# Altium PCB PCB ESP.PcbDoc
Units mm, origin at the board's own origin, x right, y up, seen from the top; angles counter-clockwise.
Board outline 62.23 x 67.94 mm, 2 copper layers (Top Layer, Bottom Layer); 31 components, 24 nets, 145 pads, 31 vias.
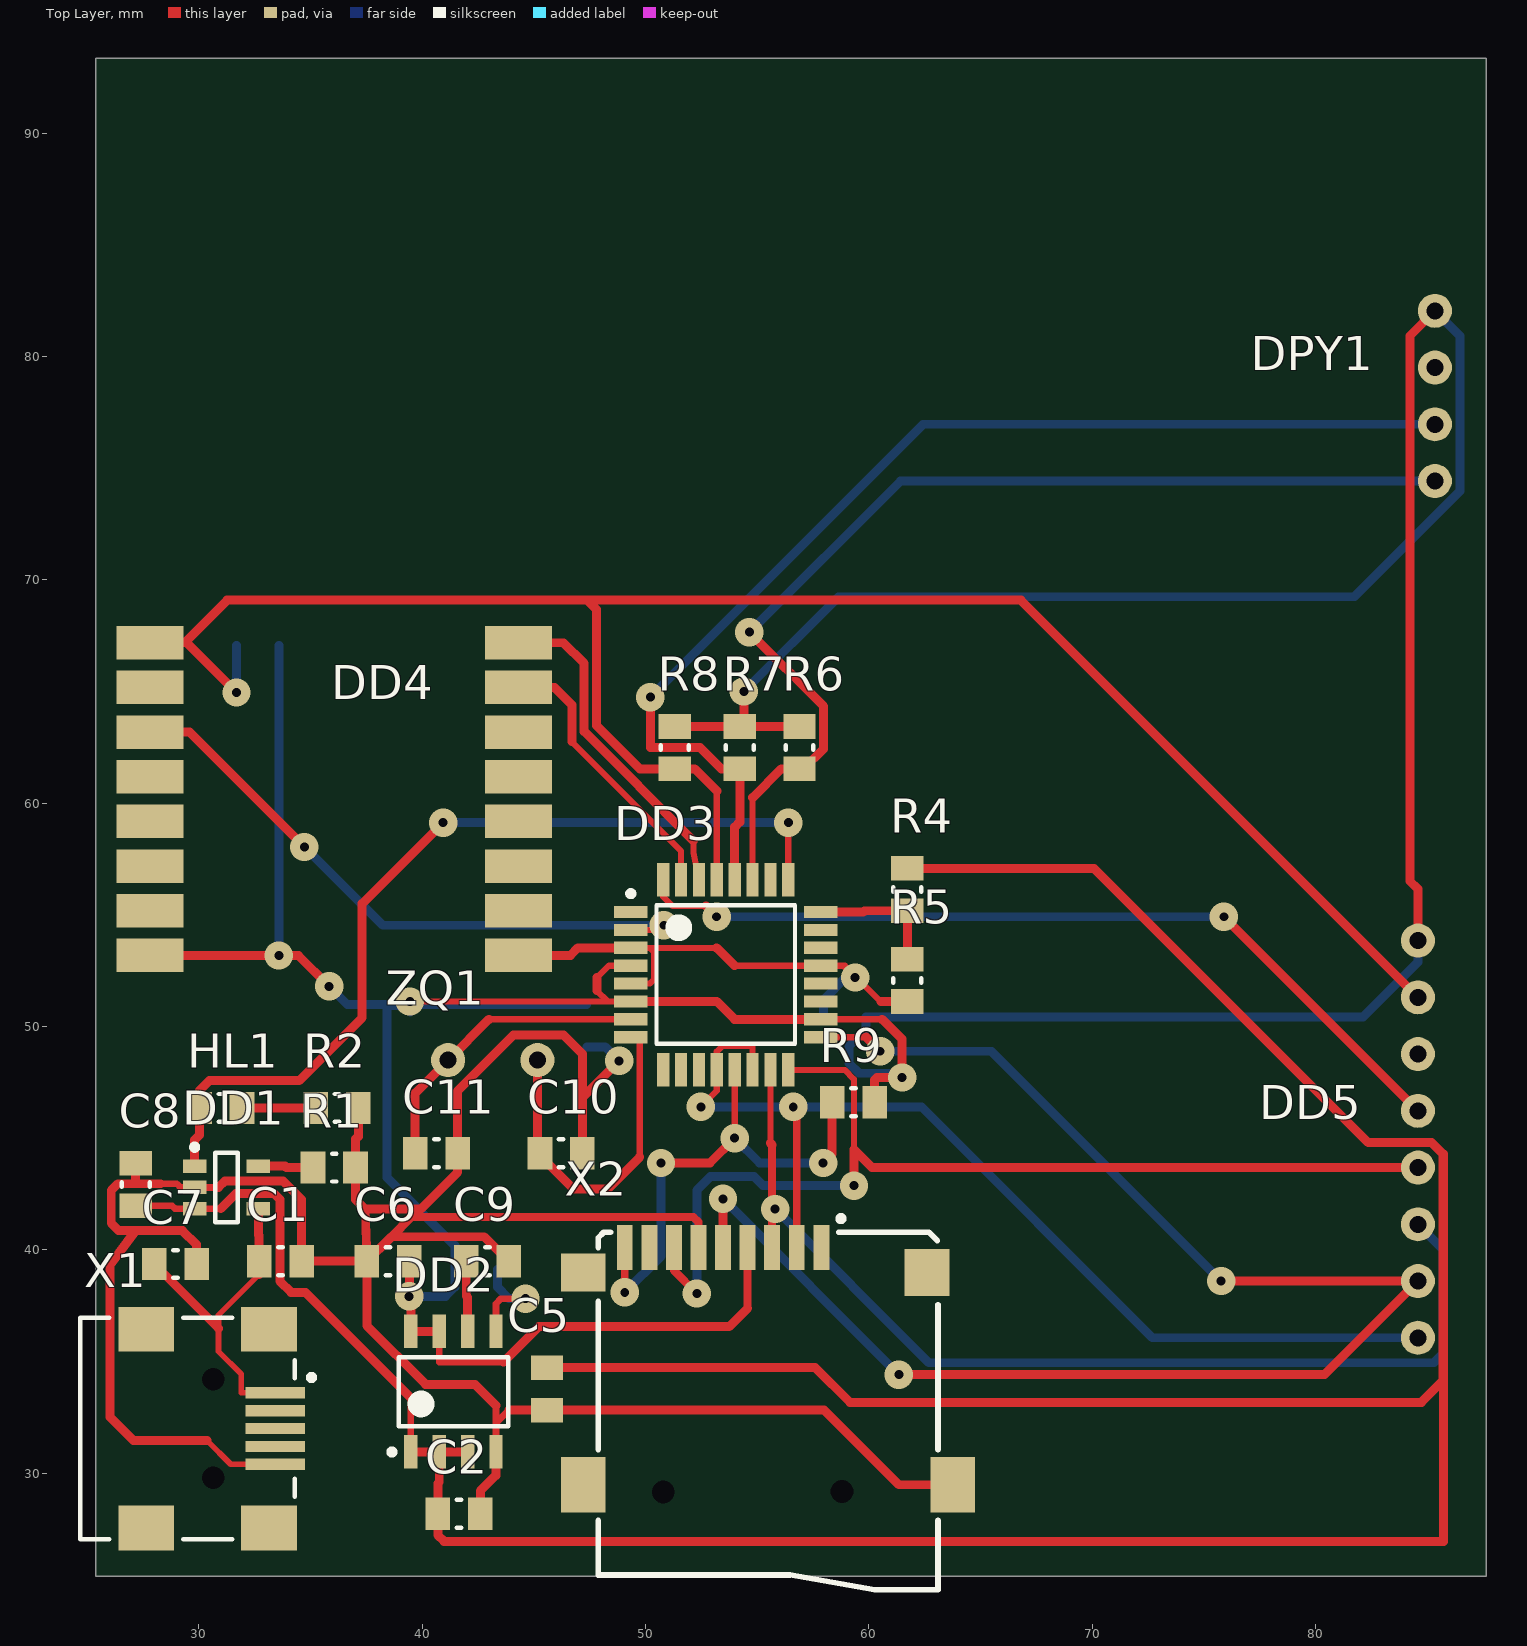
[diagram p0: Top Layer view]
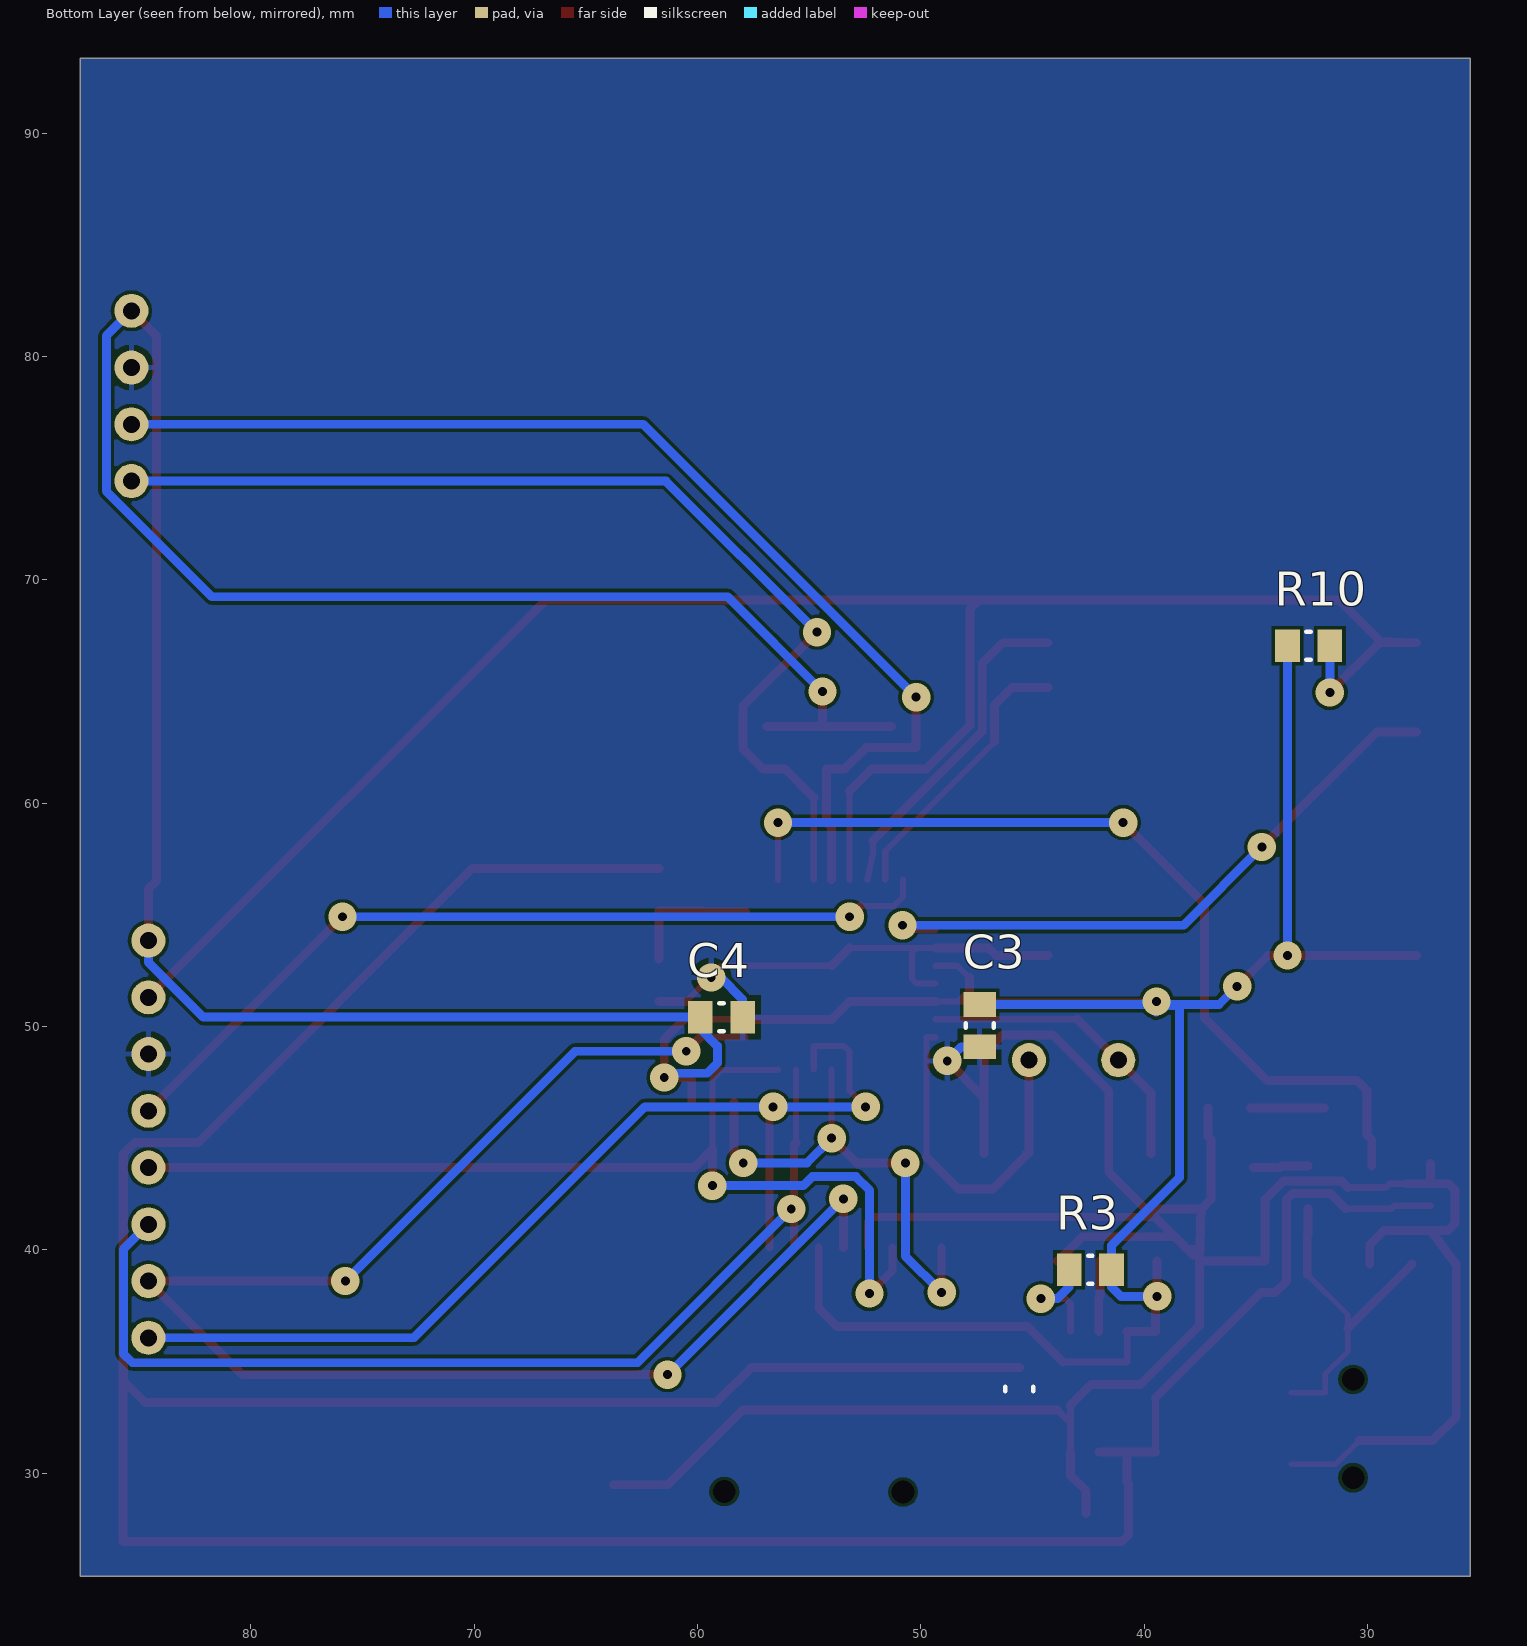
[diagram p1: Bottom Layer view, seen from below]

## Layer stack, top to bottom
Top Solder: solder mask 0.0102, Solder Resist, Dk 3.5
Top Layer: signal copper 0.0356
Dielectric 1: dielectric 0.32, FR-4, Dk 4.8
Bottom Layer: signal copper 0.0356
Bottom Solder: solder mask 0.0102, Solder Resist, Dk 3.5

## Board outline
25.4,25.4 87.63,25.4 87.63,93.345 25.4,93.345

## Design rules (kind name [scope] priority, off if disabled: settings)
Clearance [All] p1: gap=0.15
ComponentClearance [All] p1 off: gap=0.254 collisioncheckmode=3 verticalgap=0.254 showdistances=FALSE
Height [All] p1 off: minheight=0 maxheight=25.4 prefheight=12.7
PolygonConnect [All] p1: connectstyle=Relief reliefconductorwidth=0.254 reliefentries=4 polygonreliefangle="90 Angle" airgapwidth=0.254
RoutingVias [All] p1: holewidth=0.4 width=1.27 viastyle="Through Hole" minholewidth=0.4 minwidth=0.8 maxholewidth=0.711 maxwidth=1.27
SMDNeckDown [All] p1: percent=50.000
SolderMaskExpansion [All] p1: expansion=0.102
Width [All] p1: maxlimit=1 minlimit=0.2 preferedwidth=0.4 minimp=50.000000 maximp=50.000000 favimp=50.000000
28 further rules are at their usual default settings.

## Components (designator, comment, footprint, x,y, rotation, side; value= is the part's Value field where it differs from the comment)
C1 "C0805" CAPC2113X06N#1 33.655,39.497 r180 top
C2 "C0805" CAPC2113X06N#1 41.656,28.194 r180 top
C3 "C0805" CAPC2113X06N#1 47.371,50.038 r270 bottom
C4 "C0805" CAPC2113X06N#1 58.928,50.419 r180 bottom
C5 "C0805" CAPC2113X06N#2 45.593,33.782 r90 top
C6 "C0805" CAPC2113X06N#1 38.481,39.497 r0 top
C7 "C0805" CAPC2113X06N#1 28.956,39.37 r0 top
C8 "C0805" CAPC2113X06N#1 27.178,42.926 r270 top
C9 "C0805" CAPC2113X06N#1 42.926,39.497 r180 top
C10 "C0805" CAPC2113X06N#1 46.228,44.323 r180 top
C11 "C0805" CAPC2113X06N#1 40.64,44.323 r180 top
DD1 "MCP73831T" SOT95P270X145-5N 31.242,42.799 r0 top
DD2 "MCP1725-3302E/MC" SOIC127P600X175-8N 41.402,33.655 r90 top
DD3 "ATMega328" TQFP80P900X900X120-32N 53.594,52.324 r0 top
DD4 "ESP-07" ESP-07 27.813,51.181 r0 top
DD5 "RC522" RFID-RC522 87.122,25.908 r90 top
DPY1 "SSD1306" SSD 59.944,92.202 r270 top
HL1 "LED0805" CAPC2113X06N#1 30.988,46.355 r0 top
R1 "R0805" CAPC2113X06N#1 36.068,43.688 r0 top
R2 "R0805" CAPC2113X06N#1 36.195,46.355 r0 top
R3 "R0805" CAPC2113X06N#1 42.418,39.116 r0 bottom
R4 "R0805" CAPC2113X06N#1 61.722,56.134 r270 top
R5 "R0805" CAPC2113X06N#1 61.722,52.07 r270 top
R6 "R0805" CAPC2113X06N#1 56.896,62.484 r90 top
R7 "R0805" CAPC2113X06N#1 54.229,62.484 r90 top
R8 "R0805" CAPC2113X06N#1 51.308,62.484 r90 top
R9 "R0805" CAPC2113X06N#1 59.309,46.609 r0 top
R10 "R0805" CAPC2113X06N#1 32.639,67.056 r180 bottom
X1 "USB_micro" "MiniUSB Socket" 25.4,32.004 r180 top
X2 "uSD" "MICROSD Slot" 51.435,40.259 r90 top
ZQ1 "ZQ_01" HC49 42.164,47.498 r180 top

## Footprints (in the part's own frame and the unit in brackets; to place one, negate y for a bottom-side part, rotate by r counter-clockwise, add the part's x,y. Pads: shape width x height; smd on the part's side, far side on the other; paste and mask are expansions set on the pad)
CAPC2113X06N#1 [mm] "Chip Capacitor, 2-Leads, Body 2,10x1,30mm, IPC Medium Density"
  rect 1.1x1.45 smd: 1(-0.95,0) 2(0.95,0)
  silkscreen extent -0.1,-0.62 0.1,0.62, body extent -1.1,-0.7 1.1,0.7, height 0.6
CAPC2113X06N#2 [mm] "Chip Capacitor, 2-Leads, Body 2,10x1,30mm, IPC Medium Density"
  rect 1.1x1.45 smd: 1(0.95,0) 2(-0.95,0)
  body extent -1.1,-0.7 1.1,0.7, height 0.6
ESP-07 [mm] "ESP8266 ESP-07 Module"
  rect 3x1.5 smd: 1(0,16) 2(0,14) 3(0,12) 4(0,10) 5(0,8) 6(0,6) 7(0,4) 8(0,2) 9(16.5,16) 10(16.5,14) 11(16.5,12) 12(16.5,10) 13(16.5,8) 14(16.5,6) 15(16.5,4) 16(16.5,2)
HC49 [mil]
  round 60 hole 30: 1(-118.11,-39.37) 2(39.37,-39.37)
"MICROSD Slot" [mil] "MicroSD Card Socket"
  rect 80x28 smd: 1(-6,-253.47) 2(-6,-210.16) 3(-6,-166.85) 4(-6,-123.55) 5(-6,-80.24) 6(-6,-36.93) 7(-6,6.38) 8(-6,49.68) 9(-6,92.99)
  rect 98.43x78.74 smd: 10(-424.01,-485) 13(-424.01,166)
  rect 83x78.74 smd: 11(-50,-439.8)
  rect 67x78.74 smd: 12(-50,166)
  round 23.62 hole 40 unplated: MH1(-436.89,25) MH2(-436,-289.96)
  silkscreen extent -609,-459 50,140, body extent -611,-460 21,140, height 67
"MiniUSB Socket" [mm] "Connector; USB2.0, Type B, SM; 5 Position; Right Angle"
  rect 2.667x0.5 smd: 1(-8.026,-1.6) 2(-8.026,-0.8) 3(-8.026,0) 4(-8.026,0.8) 5(-8.026,1.6)
  rect 2.5x2 smd: 6(-7.75,4.45) 7(-2.25,4.45) 8(-7.75,-4.45) 9(-2.25,-4.45)
  round 0.6 hole 1.016 unplated: MH1(-5.25,2.2) MH2(-5.25,-2.2)
  silkscreen extent -9.78,-4.95 0.7,4.95, body extent -8.9,-4.95 0.7,4.95, height 3.9
RFID-RC522 [mil] "NXP RFID Reader Module"
  round 60 hole 30: 1(400,100) 2(500,100) 3(600,100) 4(700,100) 5(800,100) 6(900,100) 7(1000,100) 8(1100,100)
SOIC127P600X175-8N [mm] "SOIC, 8-Leads, Body 4,90x3,90mm, Pitch 1,27mm, IPC Medium Density"
  rect 1.5x0.6 smd: 1(-2.7,1.905) 2(-2.7,0.635) 3(-2.7,-0.635) 4(-2.7,-1.905) 5(2.7,-1.905) 6(2.7,-0.635) 7(2.7,0.635) 8(2.7,1.905)
  silkscreen extent -2.82,-2.45 1.55,2.88, body extent -1.95,-2.45 1.95,2.45, height 1.75
SOT95P270X145-5N [mm] "SOT23, 5-Leads, Body 2,90x2,70mm, Pitch 0,95mm, IPC Medium Density"
  rect 1.05x0.6 smd: 1(-1.425,0.95) 2(-1.425,0) 3(-1.425,-0.95) 4(1.425,-0.95) 5(1.425,0.95)
  silkscreen extent -1.55,-1.55 0.5,1.92, body extent -0.9,-1.55 0.9,1.55, height 1.45
SSD [mil]
  round 60 hole 30: 1(400,1000) 2(500,1000) 3(600,1000) 4(700,1000)
TQFP80P900X900X120-32N [mm] "TQFP, 32-Leads, Body 7,00x7,00mm, Pitch 0,80mm, IPC Medium Density"
  rect 1.5x0.55 smd: 1(-4.25,2.8) 2(-4.25,2) 3(-4.25,1.2) 4(-4.25,0.4) 5(-4.25,-0.4) 6(-4.25,-1.2) 7(-4.25,-2) 8(-4.25,-2.8) 17(4.25,-2.8) 18(4.25,-2) 19(4.25,-1.2) 20(4.25,-0.4) 21(4.25,0.4) 22(4.25,1.2) 23(4.25,2) 24(4.25,2.8)
  rect 0.55x1.5 smd: 9(-2.8,-4.25) 10(-2,-4.25) 11(-1.2,-4.25) 12(-0.4,-4.25) 13(0.4,-4.25) 14(1.2,-4.25) 15(2,-4.25) 16(2.8,-4.25) 25(2.8,4.25) 26(2,4.25) 27(1.2,4.25) 28(0.4,4.25) 29(-0.4,4.25) 30(-1.2,4.25) 31(-2,4.25) 32(-2.8,4.25)
  silkscreen extent -4.37,-3.1 3.1,3.75, body extent -3.5,-3.5 3.5,3.5, height 1.2

## Part data
C1 C2 C3 C4 C5 C6 C7 C8 C9 C10 C11: "Chip capasitor"
DD1: "MCP73831T Li-ion/Li-po charger"
DD2: "MCP1725-3302E/MC ULDO"
DD3: "Atmel ATMega328 MCU"
DD4: "ESP8266 Wi-Fi module"
DD5: "RC522 RFID module"
DPY1: "SSD1306 OLED Screen"
HL1: library part HL_02, "Светодиод"
R1 R2 R3 R4 R5 R6 R7 R8 R9 R10: "Резистор"
X1: library part USB, "USB micro"
X2: library part "uSD slot", "uSD slot"
ZQ1: "Элемент пьезоэлектрический с двумя выводами"

## Via types
v1: diameter 1.27, hole 0.4, Top Layer to Bottom Layer, 31 vias

## Nets (pads, with @x,y where several pads share a name; then routed paths per layer and width w, separated by ;. In a path a pad name is that pad's centre, name@x,y a point inside that pad or via, vN(x,y) a via of type N, cw(c..) or ccw(c..) an arc to the next point about the centre after c; other vN are vias at no path point)
3.3V: C3.1 C4.1 C6.2 DD2.7 DD2.8 DD3.4 DD3.6 DD3.18 DD4.8 DD5.8 DPY1.1 R3.1 R6.2 R7.2 R8.2 R9.2 R10.1 X2.4 | length 216.8
  Top Layer w0.275: v1(39.451,51.124) 48.317,51.124 ; 47.828,51.613 48.317,51.124 ; 47.828,52.191 48.362,52.724 DD3.4 ; DD3.6 48.317,51.124 ; DD3.18 60.598,50.324
  Top Layer w0.3: DD2.7 40.767,34.987 43.648,34.987
  Top Layer w0.356: 54.573,37.389 X2.4
  Top Layer w0.4: DD4.8 v1(33.589,53.181) 34.461,53.181 v1(35.841,51.801) ; v1(39.421,37.922) 39.431,37.932 v1@39.431,37.937 ; C6.2 v1@39.431,37.937 ; DD2.7 DD2.8 39.497,37.871 v1@39.431,37.937 ; 43.648,34.987 45.226,36.565 53.749,36.565 54.573,37.389 ; 47.828,51.613 47.828,52.191 ; DD3.6 53.188,51.124 53.988,50.324 DD3.18 ; R8.2 R7.2 R7.2@54.407,63.434 ; v1(54.407,64.999) R7.2@54.407,63.434 ; R6.2 R7.2@54.407,63.434 ; R9.2 60.259,47.615 60.362,47.718 v1(61.488,47.718) 61.488,49.434 60.598,50.324 ; DD5.8 84.582,56.159 84.226,56.515 84.226,80.924 DPY1.1
  Bottom Layer w0.4: v1(33.589,53.181) R10.1 ; v1(35.841,51.801) 36.654,50.988 v1@39.587,50.988 ; v1(39.421,37.922) 41.046,37.922 41.468,38.344 R3.1 41.468,40.193 38.43,43.231 38.43,50.946 39.23,50.911 v1@39.471,50.648 ; v1(39.451,51.124) v1@39.587,50.988 ; C3.1 v1@39.587,50.988 ; v1(54.407,64.999) 58.649,69.24 81.737,69.24 86.462,73.965 86.462,80.924 DPY1.1 ; v1(61.488,47.718) 61.296,47.91 59.563,47.91 59.111,48.362 59.111,49.127 59.878,49.894 C4.1 82.118,50.419 84.582,52.883 DD5.8
GND: C1.1 C2.1 C3.2 C4.2 C5.2 C6.1 C7.2 C8.1 C9.1 C10.1 C11.1 DD1.2 DD2.4 DD3.3 DD3.5 DD3.21 DD4.16 DD5.6 DPY1.2 R1.2 R2.2 R5.2 X1.5 X2.6 X2.10 | length 156.3
  Top Layer w0.25: 30.366,31.471 31.433,30.404 X1.5
  Top Layer w0.275: DD3.5 50.19,51.924 50.394,52.127 50.394,53.321 50.19,53.524 ; DD3.3 50.19,53.524 ; 53.188,53.524 50.19,53.524 ; 53.988,52.724 DD3.21 58.858,52.724 ; v1(59.385,52.197) 58.858,52.724 ; 60.532,51.12 58.928,52.724 58.858,52.724
  Top Layer w0.3: 28.284,42.963 29.021,42.963 29.185,42.799 DD1.2 30.886,42.799 ; DD2.4 43.307,32.248 ; 43.307,33.045 43.307,32.248 ; 43.891,32.832 43.307,32.248
  Top Layer w0.356: 39.522,41.478 52.144,41.478 52.373,41.25 X2.6
  Top Layer w0.4: 27.178,43.18 C8.1 ; 28.284,42.963 26.376,42.963 26.086,42.672 26.086,41.199 26.416,40.869 27.178,40.869 ; C7.2 29.906,40.234 29.271,40.869 27.178,40.869 ; 30.366,31.471 27.076,31.471 26.035,32.512 26.035,39.345 27.178,40.869 ; 30.886,42.799 31.166,43.078 33.782,43.078 34.605,42.255 C1.1 C6.1 ; R2.2 37.145,45.085 37.018,44.958 R1.2 37.018,42.266 37.456,41.828 ; 39.522,41.478 38.633,40.589 ; C2.1 42.606,29.21 43.307,29.911 DD2.4 ; 43.307,33.045 42.367,33.985 40.157,33.985 37.531,36.612 C6.1 ; C9.1 42.784,40.589 38.633,40.589 ; 43.891,32.832 C5.2 57.998,32.832 61.341,29.489 X2.10 ; DD4.16 46.634,53.181 46.977,53.524 DD3.3 ; C10.1 47.178,46.822 ; v1(48.819,48.463) 47.178,46.822 ; 53.188,53.524 53.988,52.724 ; 60.532,51.12 R5.2 ; 37.456,41.828 39.933,41.828 41.59,43.485 C11.1 41.59,47.127 44.094,49.632 46.33,49.632 47.178,48.783 47.178,46.822 ; 37.456,41.828 C6.1 ; C6.1 C6.1@37.531,39.764 ; C6.1@37.531,39.764 37.798,39.764 C6.1@38.064,40.03 ; C6.1@37.531,39.764 37.531,40.03 C6.1@38.064,40.03 ; C6.1@38.064,40.03 38.075,40.03 38.633,40.589 ; C6.1@38.064,40.03 38.623,40.589 38.633,40.589
  Bottom Layer w0.4: C3.2 48.194,49.088 v1(48.819,48.463) ; C4.2 57.978,51.206 58.969,52.197 v1(59.385,52.197)
MISO: DD3.16 DD5.4 X2.7 | length 48
  Top Layer w0.275: DD3.16 56.394,48.057 58.928,48.057 59.334,47.65 59.334,44.501
  Top Layer w0.356: X2.7 51.273,39.075 v1(52.299,38.049)
  Top Layer w0.4: v1(59.334,42.875) 59.334,44.501 60.147,43.688 DD5.4
  Bottom Layer w0.4: v1(52.299,38.049) 52.299,42.672 52.908,43.282 54.864,43.282 55.27,42.875 v1(59.334,42.875)
MOSI: DD3.15 DD5.3 X2.3 | length 47.4
  Top Layer w0.275: 55.594,44.783 DD3.15
  Top Layer w0.356: X2.3 v1@55.673,41.703 ; 55.673,44.704 v1@55.673,41.703 ; v1(55.804,41.834) v1@55.673,41.703
  Top Layer w0.4: 55.594,44.783 55.673,44.704
  Bottom Layer w0.4: v1(55.804,41.834) 62.687,34.95 85.293,34.95 85.7,35.357 85.7,40.03 DD5.3
NetC9_2: C9.2 DD2.6 | length 3.2
  Top Layer w0.4: C9.2 41.976,37.932 42.037,37.871 DD2.6
NetC10_2: C10.2 DD3.8 ZQ1.1 | length 15.9
  Top Layer w0.275: DD3.8 49.741,49.524 49.741,44.153
  Top Layer w0.4: ZQ1.1 C10.2@45.164,44.346 ; C10.2 C10.2@45.164,44.346 ; 49.741,44.153 48.309,42.721 46.789,42.721 C10.2@45.164,44.346
NetC11_2: C11.2 DD3.7 ZQ1.2 | length 13.7
  Top Layer w0.275: 42.99,50.324 DD3.7
  Top Layer w0.4: C11.2 39.69,47.024 ZQ1.2 42.99,50.324
NetDD1_5: DD1.5 R1.1 | length 2.5
  Top Layer w0.4: DD1.5 33.858,43.749 33.919,43.688 R1.1
NetDD2_5: DD2.5 R3.2 | length 4.9
  Top Layer w0.3: DD2.5 43.307,37.592 43.536,37.821 v1(44.628,37.821)
  Bottom Layer w0.4: R3.2 43.368,38.344 43.891,37.821 v1(44.628,37.821)
NetDD3_2: DD3.2 DD4.3 | length 28.2
  Top Layer w0.275: DD3.2 50.616,54.324 v1(50.825,54.534)
  Top Layer w0.4: DD4.3 29.591,63.181 v1(34.733,58.039)
  Bottom Layer w0.4: v1(34.733,58.039) 38.238,54.534 v1(50.825,54.534)
NetDD3_13: DD3.13 R9.1 X2.9 | length 22.6
  Top Layer w0.275: v1(53.994,45.004) DD3.13
  Top Layer w0.356: v1(49.073,38.1) X2.9
  Top Layer w0.4: v1(50.696,43.891) 52.881,43.891 v1(53.994,45.004) ; v1(57.953,43.891) 58.359,44.298 R9.1
  Bottom Layer w0.4: v1(49.073,38.1) 50.696,39.724 v1(50.696,43.891) ; v1(53.994,45.004) 55.107,43.891 v1(57.953,43.891)
NetDD3_24: DD3.24 R4.2 R5.1 | length 6.1
  Top Layer w0.4: DD3.24 59.741,55.124 59.801,55.184 R4.2 R5.1
NetDD3_30: DD3.30 DD4.9 | length 15.1
  Top Layer w0.275: 52.146,58.317 52.146,57.779 DD3.30
  Top Layer w0.4: DD4.9 46.33,67.181 47.253,66.258 47.253,63.21 52.146,58.317
NetDD3_31: DD3.31 DD4.10 | length 12.6
  Top Layer w0.275: 46.703,62.749 51.594,57.857 DD3.31
  Top Layer w0.4: DD4.10 45.919,65.181 46.703,64.397 46.703,62.749
NetDD3_32: DD3.32 DD5.5 | length 38.5
  Top Layer w0.275: DD3.32 50.794,55.81 51.206,55.397 52.705,55.397
  Top Layer w0.4: 52.705,55.397 v1(53.188,54.915) ; v1(75.895,54.915) DD5.5
  Bottom Layer w0.4: v1(53.188,54.915) v1(75.895,54.915)
NetHL1_2: HL1.2 R2.1 | length 3.3
  Top Layer w0.4: HL1.2 R2.1
RST: DD3.29 DD4.1 DD5.7 R8.1 R10.2 | length 88.2
  Top Layer w0.275: DD3.29 53.194,60.547
  Top Layer w0.4: v1(31.689,64.956) 29.412,67.233 ; 53.194,60.547 52.207,61.534 R8.1 49.751,61.534 47.803,63.482 47.803,68.682 47.396,69.088 ; DD5.7 66.802,69.088 47.396,69.088 ; 29.412,67.233 DD4.1 29.36,67.181 29.412,67.233 ; 29.412,67.233 31.267,69.088 47.396,69.088
  Bottom Layer w0.4: v1(31.689,64.956) R10.2
SCK: DD3.17 DD5.2 X2.5 | length 69.5
  Top Layer w0.275: DD3.17 59.874,49.524
  Top Layer w0.4: X2.5 v1(53.473,42.285) ; 59.874,49.524 v1(60.503,48.895) ; v1(61.341,34.417) 80.391,34.417 DD5.2 v1(75.768,38.608)
  Bottom Layer w0.4: v1(53.473,42.285) v1(61.341,34.417) ; v1(60.503,48.895) 65.481,48.895 v1(75.768,38.608)
SCL: DD3.28 DPY1.3 R7.1 | length 51.9
  Top Layer w0.4: v1(50.216,64.745) 50.216,62.484 52.451,62.484 53.401,61.534 R7.1 54.229,59.163 53.994,58.928 DD3.28
  Bottom Layer w0.4: v1(50.216,64.745) 62.433,76.962 DPY1.3
SDA: DD3.27 DPY1.4 R6.1 | length 47.8
  Top Layer w0.275: DD3.27 54.794,60.245
  Top Layer w0.4: v1(54.65,67.655) 57.971,64.334 57.971,62.431 57.074,61.534 R6.1 56.083,61.534 54.794,60.245
  Bottom Layer w0.4: v1(54.65,67.655) 61.417,74.422 DPY1.4
SS: DD3.12 DD3.14 DD5.1 X2.2 | length 48.3
  Top Layer w0.275: v1(52.476,46.406) 53.194,47.123 DD3.12 53.194,48.876 53.442,49.124 54.794,49.124 DD3.14
  Top Layer w0.356: X2.2 v1@56.773,46.249
  Top Layer w0.4: v1(56.617,46.406) v1@56.773,46.249
  Bottom Layer w0.4: v1(52.476,46.406) v1(56.617,46.406) 62.357,46.406 72.695,36.068 DD5.1
STAT: DD1.1 DD3.25 HL1.1 | length 40.4
  Top Layer w0.275: DD3.25 v1(56.394,59.131)
  Top Layer w0.4: DD1.1 29.817,44.933 30.038,45.154 HL1.1 30.038,47.142 30.475,47.579 34.498,47.579 37.313,50.394 37.313,55.499 v1(40.945,59.131)
  Bottom Layer w0.4: v1(40.945,59.131) v1(56.394,59.131)
VBAT: C2.2 C5.1 C8.2 DD1.3 DD2.1 DD2.2 DD2.3 R4.1 | length 170.4
  Top Layer w0.3: C8.2 28.803,41.976 28.93,41.849 DD1.3 30.988,41.849 ; DD2.1 39.497,33.376
  Top Layer w0.4: 30.988,41.849 31.659,42.52 33.376,42.52 33.63,42.266 33.63,38.608 34.138,38.1 34.773,38.1 39.497,33.376 ; DD2.1 DD2.2 ; DD2.3 DD2.2 ; C5.1 57.597,34.732 59.157,33.172 84.734,33.172 85.7,34.138 85.7,44.298 85.192,44.806 82.357,44.806 70.079,57.084 R4.1 ; 85.725,44.298 85.725,26.949 40.985,26.949 40.706,27.229 C2.2 40.706,29.54 40.767,29.601 DD2.2
VBUS: C1.2 C7.1 DD1.4 X1.1 | length 15
  Top Layer w0.25: C1.2@32.705,38.903 30.886,37.084 30.886,36.49 30.886,35.458 31.902,34.442 31.902,33.604 X1.1
  Top Layer w0.4: C7.1 30.886,36.49 ; DD1.4 32.667,40.678 32.705,40.64 C1.2 C1.2@32.705,38.903
pads on no net: DD3.1 DD3.9 DD3.10 DD3.11 DD3.19 DD3.20 DD3.22 DD3.23 DD3.26 DD4.2 DD4.4 DD4.5 DD4.6 DD4.7 DD4.11 DD4.12 DD4.13 DD4.14 DD4.15 X1.2 X1.3 X1.4 X1.6 X1.7 X1.8 X1.9 X1.MH1 X1.MH2 X2.1 X2.8 X2.11 X2.12 X2.13 X2.MH1 X2.MH2

## Polygon pours and split planes (outlines as drawn)
GND on Bottom Layer "Top Layer-No Net" (solid, pour order 2): 25.4,93.345 25.4,25.4 87.63,25.4 87.63,93.345

## Text inside footprints (layer, text, board x,y; h text height)
X1: Mechanical 1 "PCB Edge" at 24.968,36.04 h0.25 r270
X2: Mechanical 1 "PCB Edge" at 60.96,25.629 h0.25